# Altium PCB PCB_VL53L0X.PcbDoc
Units mm, origin at the board's own origin, x right, y up, seen from the top; angles counter-clockwise.
Board outline 40 x 25.4 mm, 2 copper layers (Top Layer, Bottom Layer); 11 components, 9 nets, 50 pads, 9 vias.
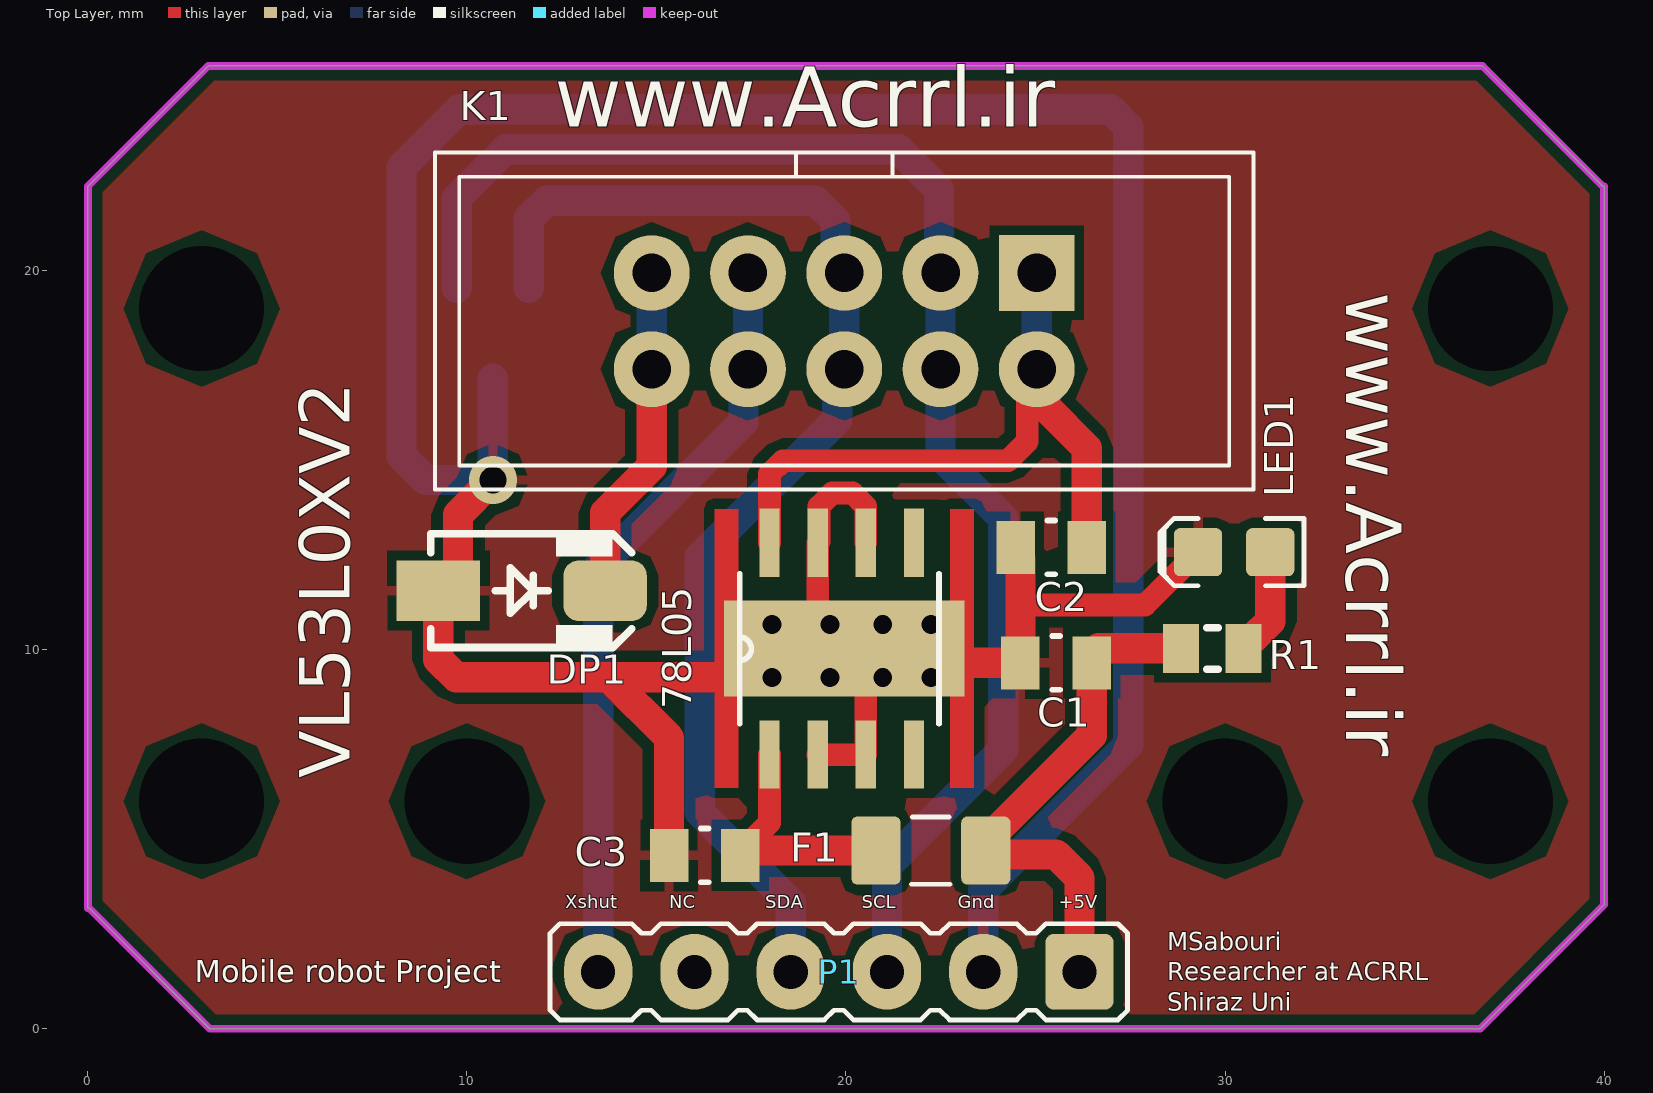
[diagram p0: Top Layer view]
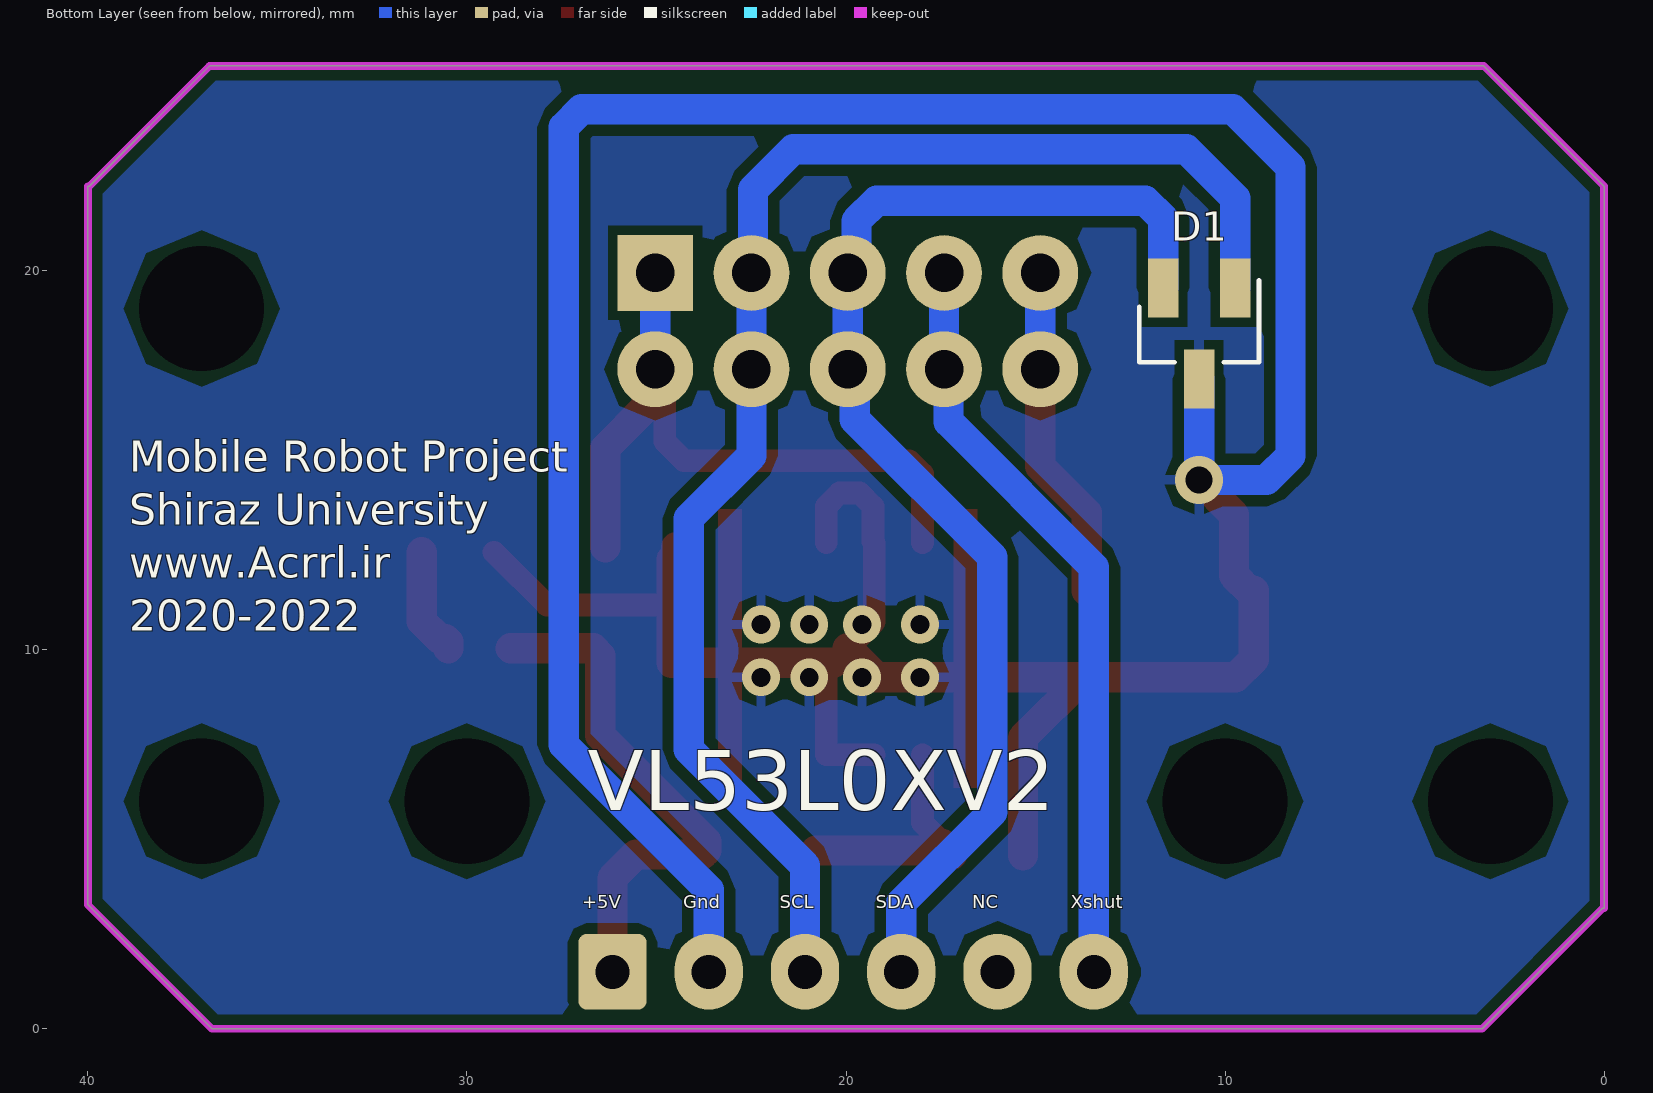
[diagram p1: Bottom Layer view, seen from below]

## Layer stack, top to bottom
Top Solder: solder mask 0.0102, Solder Resist, Dk 3.5
Top Layer: signal copper 0.0356
Dielectric 1: dielectric 0.32, FR-4, Dk 4.8
Bottom Layer: signal copper 0.0356
Bottom Solder: solder mask 0.0102, Solder Resist, Dk 3.5

## Board outline
3.212,0 0.037,3.175 0,3.175 0,22.225 3.175,25.4 36.793,25.4 39.968,22.225 40,22.225 40,3.27 36.73,0

## Design rules (kind name [scope] priority, off if disabled: settings)
Clearance [All] p1: gap=0.254 ignorepadtopadclearanceinfootprint=FALSE except(0: Arc-Hole Track-Hole SMDPad-Hole THPad-Hole Via-Hole Fill-Hole Poly-Hole Region-Hole Text-Hole)
PolygonConnect [All] p1: connectstyle=Relief reliefconductorwidth=0.254 reliefentries=4 polygonreliefangle="90 Angle" airgapwidth=0.254
RoutingVias [All] p1: holewidth=0.711 width=1.27 viastyle="Through Hole" minholewidth=0.711 minwidth=1.27 maxholewidth=0.711 maxwidth=1.27
SolderMaskExpansion [All] p1: expansion=0.102 istentingtop=FALSE
Width [All] p1: maxlimit=0.8 minlimit=0.254 preferedwidth=0.5
30 further rules are at their usual default settings.

## Components (designator, comment, footprint, x,y, rotation, side; value= is the part's Value field where it differs from the comment)
78L05 "" 78L05CD15V5V_LIB 17.541,10.033 r90 top (schematic designator U1)
C1 "100nF" 0805 25.542,9.652 r0 top value=470nF
C2 "0.33uF" 0805 25.415,12.7 r0 top value=470nF
C3 "0.33uF" 0805 16.271,4.572 r0 top value=470nF
D1 "SM712" psm712 11.633,19.545 r270 bottom
DP1 "1N5819" 430X270D 11.445,11.557 r0 top
F1 "Slow-blow" RESC3216X70N 22.24,4.699 r0 top value=100mA
K1 "IDC10" IDC10-B 25.034,19.939 r180 top
LED1 "Green" LED-0805-K 30.241,12.573 r180 top
P1 "Header 6pin" HDR1X6 26.161,1.5 r180 top locked
R1 "330" "RES 0805 (2012X06L)" 30.494,10.033 r180 top

## Footprints (in the part's own frame and the unit in brackets; to place one, negate y for a bottom-side part, rotate by r counter-clockwise, add the part's x,y. Pads: shape width x height; smd on the part's side, far side on the other; paste and mask are expansions set on the pad)
78L05CD15V5V_LIB [mil]
  rect 70.87x21 smd: 1(-110.35,-17.44) 2(-110.35,-67.44) 3(-110.35,-117.44) 4(-110.35,-167.44) 5(109.65,-167.44) 6(109.65,-117.44) 7(109.65,-67.44) 8(109.65,-17.44)
  rect 100x250 smd paste+0 mask+0: 7(0,-95)
  Top Layer region: -145,-230 145,-230 145,-205 -145,-205
  Top Layer region: -145,15 145,15 145,40 -145,40
  Top Layer region: 85,105
  silkscreen extent -78,-193 78,14
430X270D [mm] "SMA Molded Diode, 2-Leads, Body 4.3x2.7mm"
  rect 2.2x1.6 smd: 1(-2.2,0)
  rrect50% 2.2x1.6 smd: 2(2.2,0)
  silkscreen extent -2.4,-1.5 2.9,1.5, body extent -2.75,-1.4 2.75,1.4, height 2.6
0805 [mil]
  rect 40x55 smd: 1(-37,0) 2(37,0)
  silkscreen extent -4,-28 4,28, body extent -47,-28 47,28, height 24
HDR1X6 [mm] "Connector; Header; 6 Position"
  rrect25% 1.8x2 hole 0.9: 1(0,0)
  oval 1.8x2 hole 0.9: 2(2.54,0) 3(5.08,0) 4(7.62,0) 5(10.16,0) 6(12.7,0)
  silkscreen extent -1.27,-1.27 13.97,1.27
IDC10-B [mm]
  rect 2x2 hole 1.016: 1(0,0)
  round 2 hole 1.016: 2(0,2.54) 3(2.54,0) 4(2.54,2.54) 5(5.08,0) 6(5.08,2.54) 7(7.62,0) 8(7.62,2.54) 9(10.16,0) 10(10.16,2.54)
  silkscreen extent -5.72,-3.18 15.87,5.72, body extent -5.72,-3.18 15.88,5.72, height 9.1
LED-0805-K [mil]
  round 20 on Mech15: 0(0,0)
  rrect25% 50x50 smd: A(-37.5,0) K(37.5,0)
  Top Layer pour cut-out: -15,30 15,30 15,-30 -15,-30
  silkscreen extent -72,-35 77,35, body extent -39,-25 39,25, height 31
psm712 [mil]
  rect 61.42x31.5 smd: 1(0,74.8) 2(0,0) 3(94.48,37.4)
  silkscreen extent -8,-25 77,100
"RES 0805 (2012X06L)" [mm] "Chip Resistor, 2-Leads, Body 2.0x1.3mm, IPC High Density _ (0.100 W)"
  rect 0.95x1.3 smd: 1(0,0) 2(1.65,0)
  silkscreen extent 0.67,-0.55 0.97,0.55, body extent -0.19,-0.63 1.84,0.64, height 0.6
RESC3216X70N [mm] "Chip Resistor, Body 3.2x1.6mm, EIA 1206, IPC Medium Density"
  round 0.508 on Mech15: 0(0,0)
  rrect25% 1.3x1.8 smd: 1(-1.45,0) 2(1.45,0)
  silkscreen extent -0.51,-0.89 0.51,0.89, body extent -1.62,-0.82 1.63,0.83, height 0.69

## Part data
78L05: library part "MC78L05ACDG 5V Regulator"
C1 C2 C3: library part "CAP 470nF 50V", "CAP CER 0.1UF 50V X7R 0805", Package=0805, Rating=50V, Tolerance=10%
D1: library part SM712.TC, "Asymmetrical TVS Diode for  Extended Common-Mode RS-485", Manufacturer=SEMTECH, Operating Temp="-55 to 125 °C", Storage Temp="-55 to 150 °C", Manufacture Part #=SM712.TC
DP1: "Schottkey Rectifiers", Data=16-12-2016, Designer="Abbas Basereh"
F1: library part FUSE_160mA_1206, "Fuse 160mA 63VDC 1206 SMD", Manufacturer 1="Holly Fuse", Manufacturer Part Number 1=12T-0160L, Package / Case="1206 (3216 metric)", Ratings="160mA; 63VDC; slow-blow", SCDType=spec
K1: "BOXHEADER 10 PIN", Color=Gray, Manufacturer="Assmann Electronics Inc", Manufacturer Part Number=AWHW10G-0202-T-R, Supplier Part Number=HRP10H-ND, Category="Connectors, Interconnects", Connector Type="Header, Shrouded", Contact Finish=Gold, Contact Finish Thickness=Flash, Contact Mating Length=-, Contact Type="Male Pin", Fastening Type=-, Features=-, Mounting Type="Through Hole", Number of Positions=10, Number of Positions Loaded=All, Number of Rows=2, Packaging=Tray, Pitch="0.100\" (2.54mm)", RoHS="RoHS Compliant", Row Spacing="0.100\" (2.54mm)", Supplier=Digi-Key, Supplier 1=Digi-Key, Supplier Part Number 1=HRP10H-ND, Termination=Solder
LED1: library part LED_SMD_Green_0805_6mcd, "LED, 0805 SMD, Green", Manufacturer 1=LITE-ON, Manufacturer Part Number 1=LTST-C171GKT, Package / Case=0805, Ratings="6 mcd; 569 nm", Supplier Part Number 1=160-1423-1-ND, Color=Green, Material=GaP, SCDType=source, Supplier 1=Digi-Key
P1: library part Header6P, "Header, 6-pin"
R1: library part Resistor, "Resistor", Power="1/8 W", Tolerance=5%

## Free pads (board coordinates)
  round 0 hole 3.3: 2(30,6) 4(3,6) 4(3,19) 4(10,6) 4(37,6) 4(37,19)

## Via types
v1: diameter 1, hole 0.5, Top Layer to Bottom Layer, 8 vias
v2: diameter 1.27, hole 0.711, Top Layer to Bottom Layer, 1 vias

## Nets (pads, with @x,y where several pads share a name; then routed paths per layer and width w, separated by ;. In a path a pad name is that pad's centre, name@x,y a point inside that pad or via, vN(x,y) a via of type N, cw(c..) or ccw(c..) an arc to the next point about the centre after c; other vN are vias at no path point)
GND: 78L05.2 78L05.3 78L05.6 78L05.7 C1.1 C2.1 C3.1 D1.3 DP1.1 LED1.K P1.2 | length 102.3
  Top Layer w0.6: 78L05.2 78L05.3 20.524,9.463 20.335,9.652 19.954,10.033 19.254,10.733 19.254,12.818 19.287,12.851 19.287,13.781 19.639,14.132 20.172,14.132 20.524,13.781 78L05.6 ; 24.602,11.176 27.892,11.176 LED1.K
  Top Layer w0.8: v2(10.683,14.478) 9.762,13.557 9.762,11.957 9.362,11.557 DP1.1 9.245,9.74 9.714,9.271 13.731,9.271 ; C3.1 15.331,7.671 13.731,9.271 ; 78L05.7@19.954,10.033 19.192,9.271 13.731,9.271 ; 78L05.7@20.335,9.652 C1.1 24.602,11.176 24.602,12.383 24.475,12.509 C2.1
  Bottom Layer w0.8: D1.3 v2(10.683,14.478) 8.905,14.478 8.27,15.113 8.27,22.733 9.794,24.257 26.978,24.257 27.447,23.788 27.447,7.493 23.621,3.667 P1.2
  other v1: 18.049,9.271 19.573,9.271 20.97,9.271 22.24,9.271 18.049,10.668 19.573,10.668 20.97,10.668 22.24,10.668
NetC3_2: 78L05.1 C3.2 F1.1 | length 6.7
  Top Layer w0.6: C3.2 17.211,4.591 17.211,4.763 17.419,4.971 17.524,4.971 17.984,5.43 78L05.1
  Top Layer w0.8: C3.2@17.211,4.591 17.319,4.699 F1.1
NetDP1_2: DP1.2 K1.9 K1.10 | length 8.9
  Top Layer w0.8: DP1.2 13.645,13.614 14.874,14.843 K1.10
  Bottom Layer w0.8: K1.10 K1.9
NetLED1_A: LED1.A R1.1 | length 2.9
  Top Layer w0.8: R1.1 30.494,10.208 30.569,10.283 30.725,10.283 31.194,10.752 LED1.A
SCL: D1.1 K1.3 K1.4 P1.3 | length 38.7
  Bottom Layer w0.8: D1.1 9.733,21.91 11.026,23.203 21.389,23.203 22.453,22.139 22.453,19.98 K1.3 22.494,15.113 24.145,13.462 24.145,7.366 21.081,4.302 P1.3
SDA: D1.2 K1.5 K1.6 P1.4 | length 32.8
  Bottom Layer w0.8: D1.2 11.633,21.375 12.102,21.844 19.192,21.844 19.724,21.312 19.724,20.169 K1.5 K1.6 19.77,17.215 19.77,16.072 16.144,12.446 16.144,5.715 18.541,3.318 P1.4
V5: C1.2 F1.2 P1.1 R1.2 | length 14
  Top Layer w0.8: P1.1 26.161,3.976 25.54,4.597 23.792,4.597 F1.2 23.69,4.949 26.482,7.741 C1.2 26.482,9.842 26.672,10.033 R1.2
VCC: 78L05.8 C2.2 K1.1 K1.2 | length 18.8
  Top Layer w0.6: 78L05.8 17.984,14.635 18.335,14.986 24.272,14.986 24.78,15.494 24.78,17.145 K1.2
  Top Layer w0.8: K1.2 25.264,17.169 25.264,16.407 26.355,15.316 C2.2
  Bottom Layer w0.8: K1.2 K1.1
Xshut: K1.7 K1.8 P1.6 | length 20.1
  Bottom Layer w0.8: P1.6 13.461,12.176 17.293,16.008 17.293,17.278 K1.8 K1.7
pads on no net: 78L05.4 78L05.5 F1.0 LED1.0 P1.5

## Polygon pours and split planes (outlines as drawn)
GND on Bottom Layer "GND_L02_P-001" (solid, pour order 6): 3.17,25.4 0,22.23 0.037,22.193 0.037,3.175 3.212,0 36.73,0 40,3.27 40,22.225 39.968,22.225 36.793,25.4
GND on Bottom Layer "GND_L02_P-001" (solid, pour order 3): 3.063,11.938
GND on Top Layer "GND_L02_P-001" (solid, pour order 7): 36.825,25.4 40,22.225 40,3.27 36.73,0 3.175,0 0,3.175 0,22.225 3.175,25.4

## Keep-outs
Keep-Out Layer:
  lines w0.2: 0,3.175 0,22.23 ; 0,22.225 3.175,25.4 9.806,25.4 30.162,25.4 36.793,25.4 39.968,22.225 ; 0.037,3.175 3.212,0 9.842,0 30.099,0 36.73,0 40,3.27 40,22.225

## Silkscreen, mask and mechanical layers (free items; w line width, h text height)
Top Overlay:
  text "www.Acrrl.ir" at 12.319,23.281 h2.7
  text "www.Acrrl.ir" at 32.715,19.431 h2.5 r270
  text "VL53L0XV2" at 7.359,6.604 h2.3 r90
  text "Xshut" at 12.594,3.058 h0.6
  text "NC" at 15.331,3.058 h0.6
  text "SDA" at 17.871,3.058 h0.6
  text "SCL" at 20.411,3.058 h0.6
  text "Gnd" at 22.951,3.058 h0.6
  text "+5V" at 25.618,3.058 h0.6
  text "Mobile robot Project" at 2.822,1.026 h1
  text "MSabouri / Researcher at ACRRL / Shiraz Uni" at 28.476,0.315 h0.8
Bottom Overlay:
  text "Mobile Robot Project / Shiraz University / www.Acrrl.ir / 2020-2022" at 38.912,10.22 h1.4
  text "VL53L0XV2" at 26.812,5.247 h2.7
  text "Xshut" at 14.076,3.058 h0.6
  text "NC" at 16.673,3.058 h0.6
  text "SDA" at 19.213,3.058 h0.6
  text "SCL" at 21.753,3.058 h0.6
  text "Gnd" at 24.293,3.058 h0.6
  text "+5V" at 26.96,3.058 h0.6

## Text inside footprints (layer, text, board x,y; h text height)
D1: Mechanical 15 "Q3" at 9.284,19.228 h0.5